# Altium PCB SmartWatch.PcbDoc
Units mm, origin at the board's own origin, x right, y up, seen from the top; angles counter-clockwise.
Board outline 43.1 x 46 mm, 4 copper layers (Top Layer, GND Layer, 3v3 Layer, Bottom Layer), stack 0.603 mm thick; 83 components, 69 nets, 346 pads, 97 vias.
Unrouted connection lines stored in the file: 1.
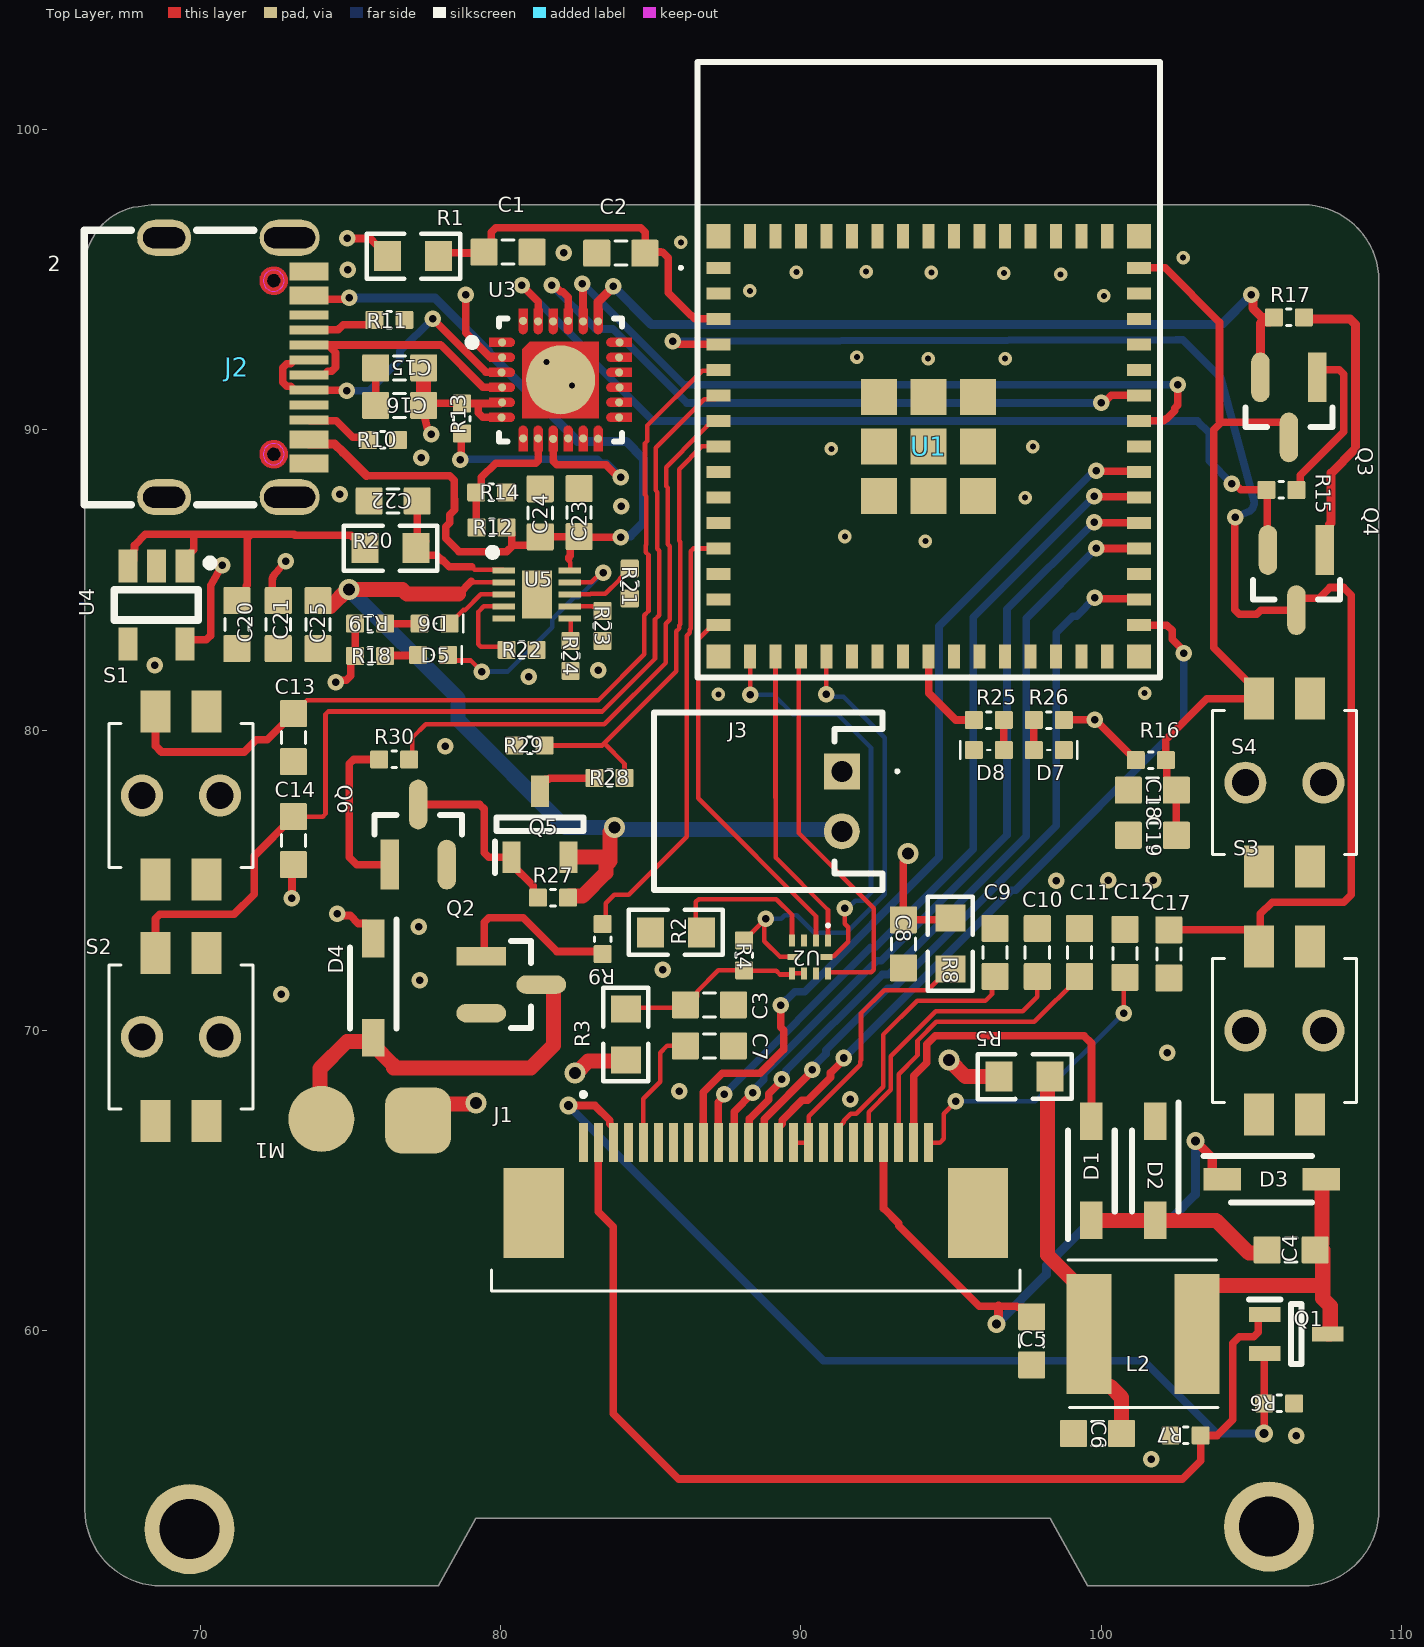
[diagram p0: Top Layer view]
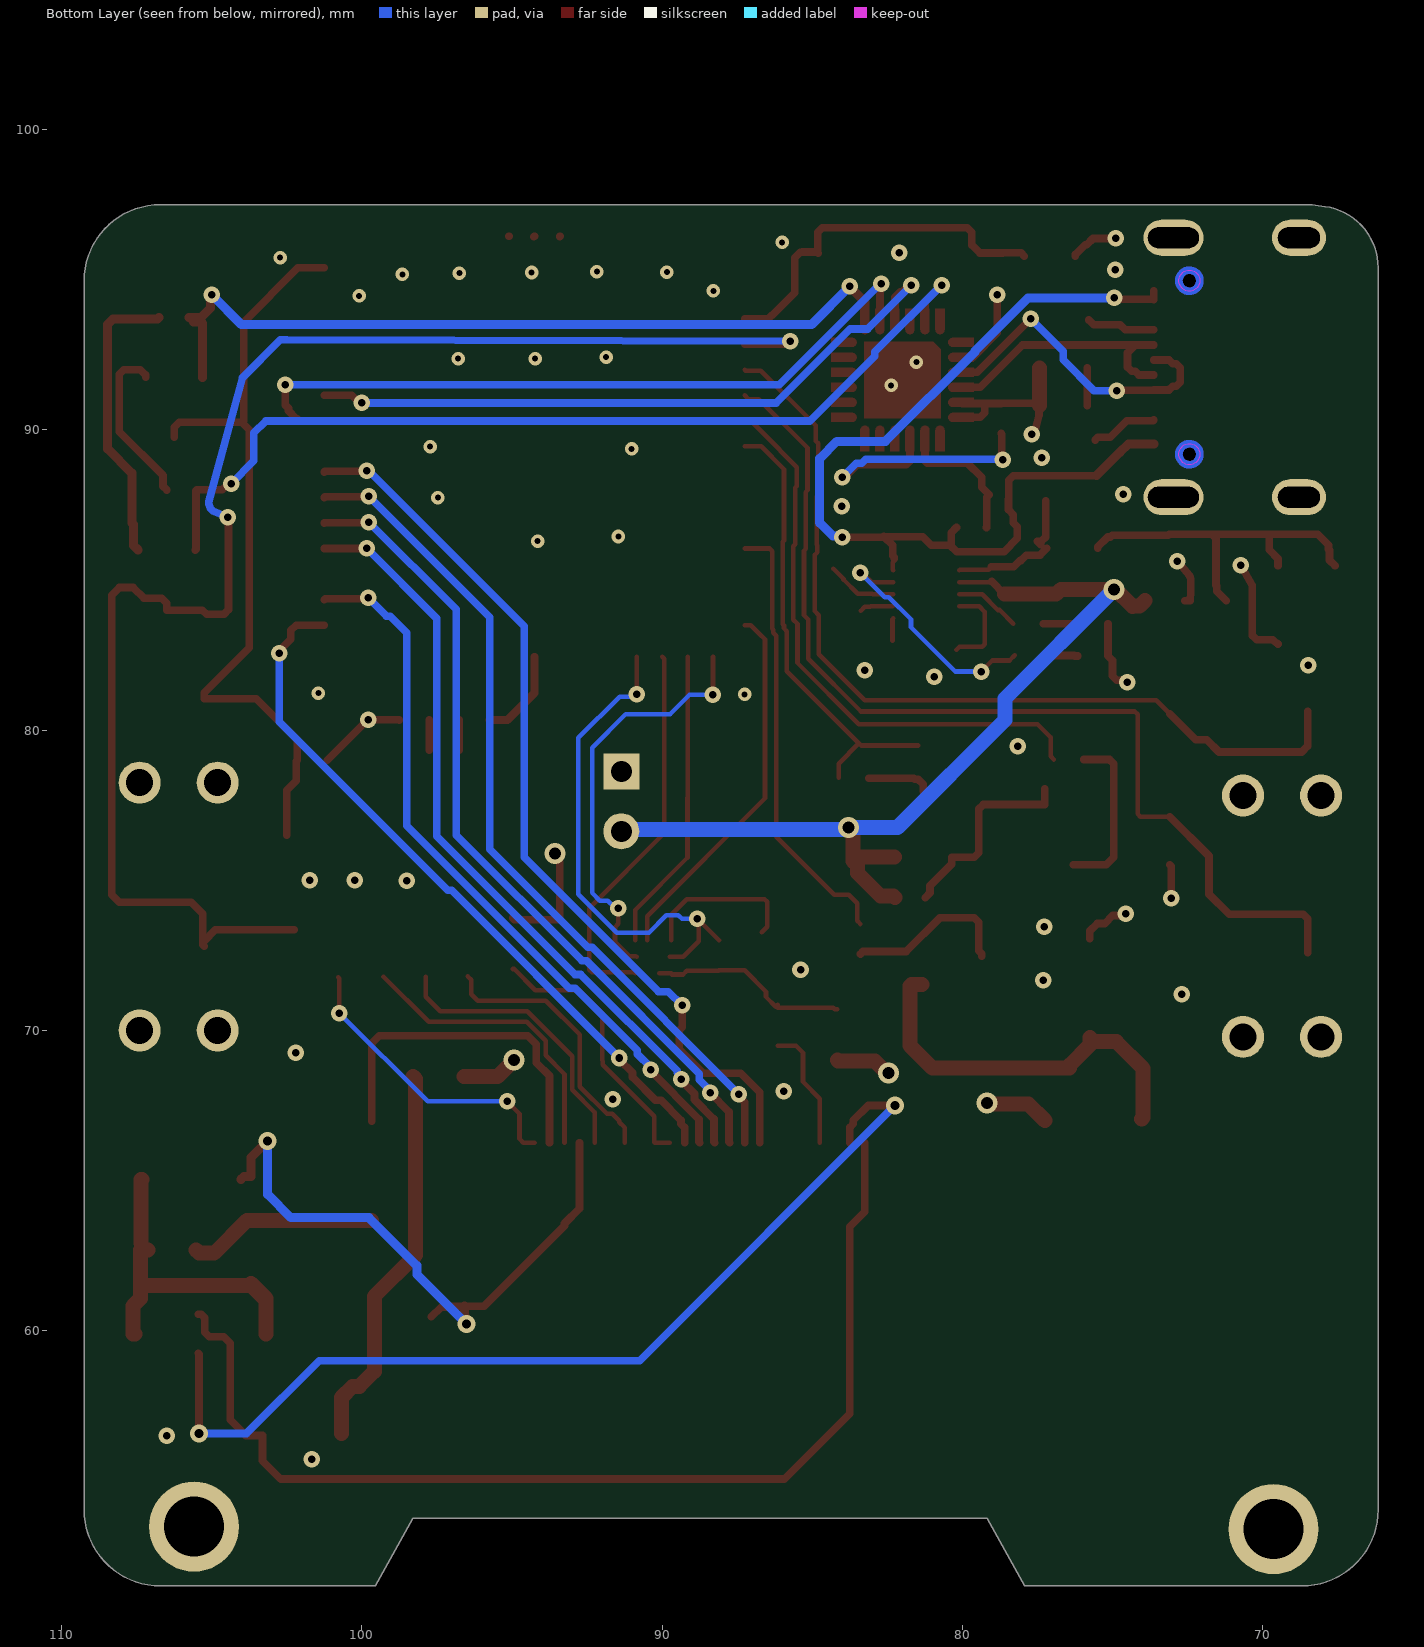
[diagram p1: Bottom Layer view, seen from below]
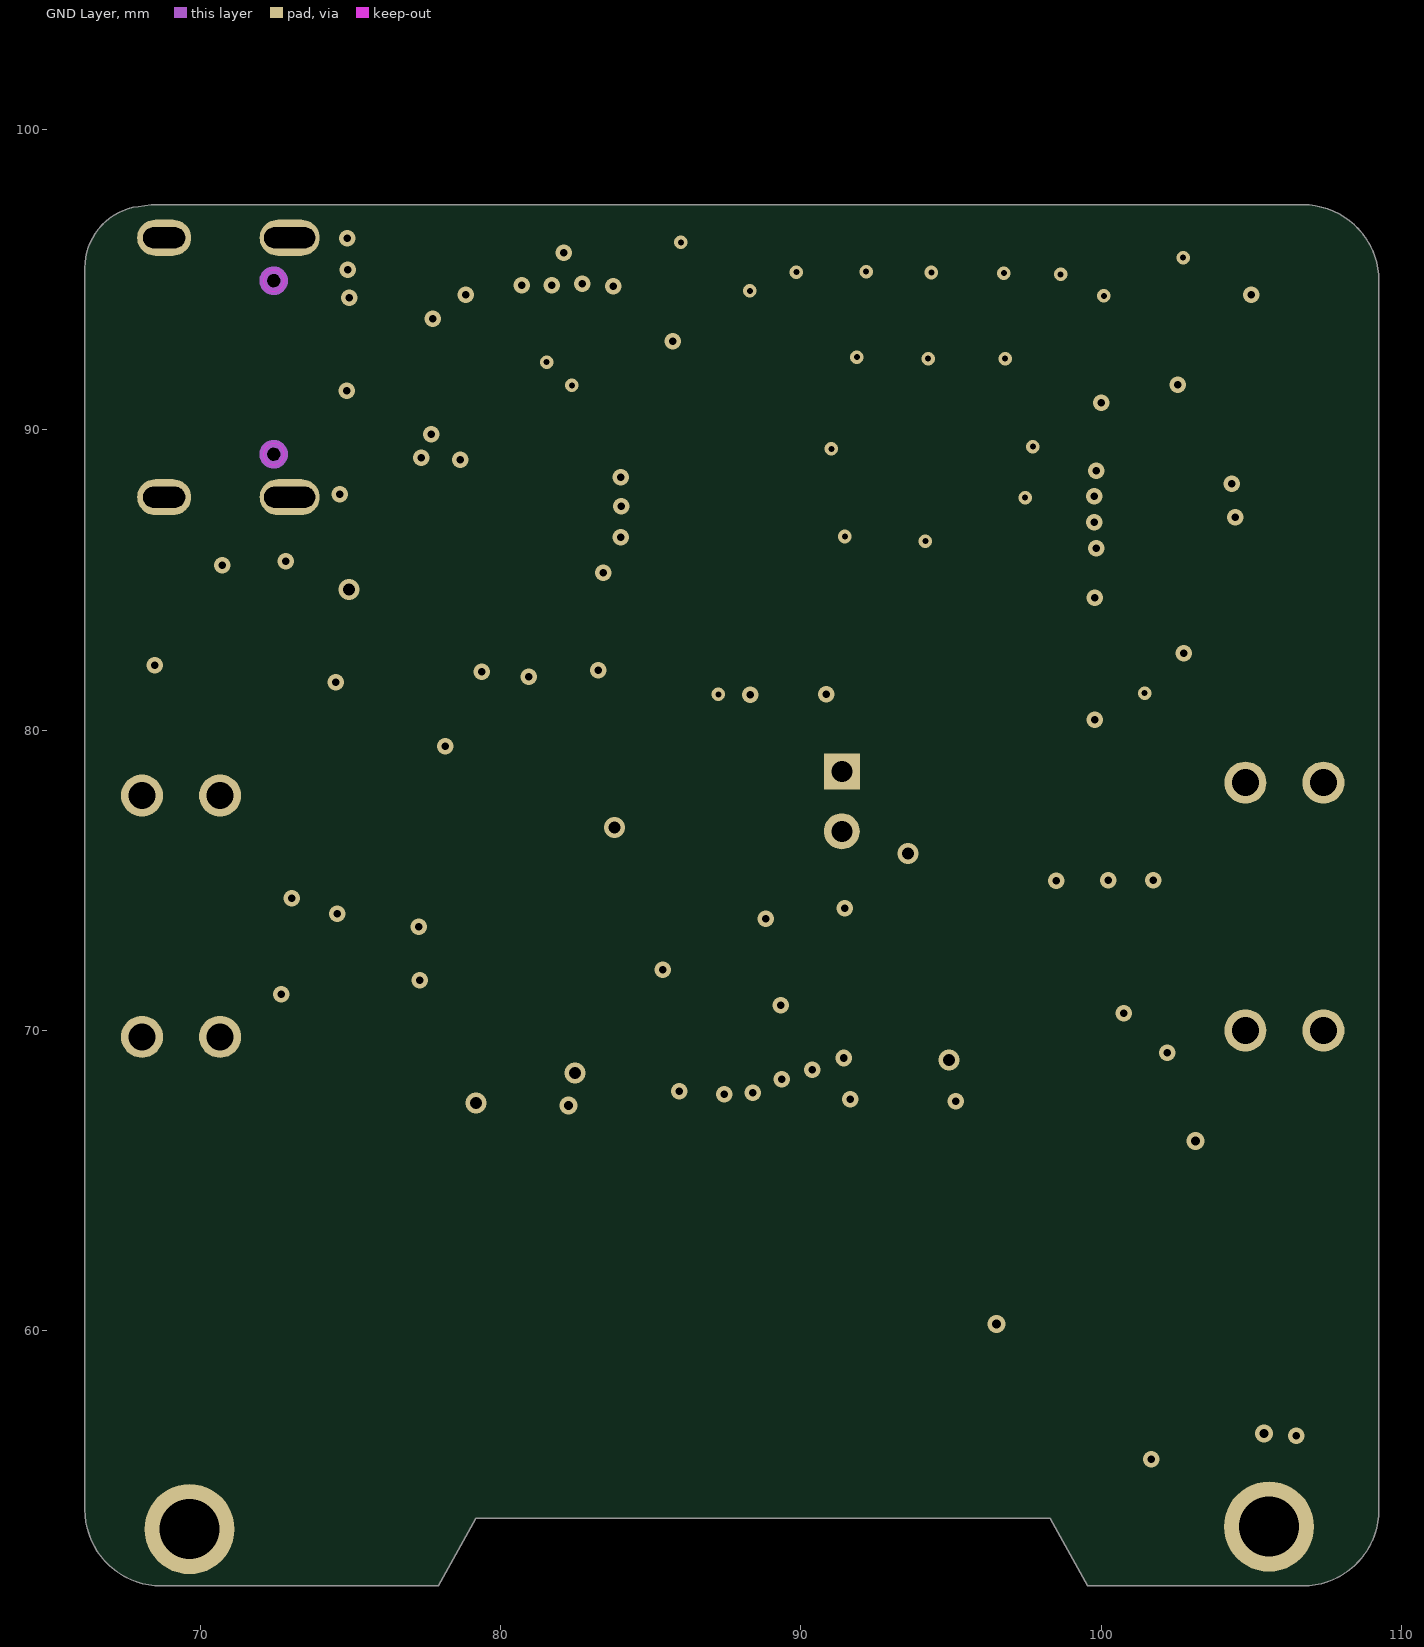
[diagram p2: GND Layer]
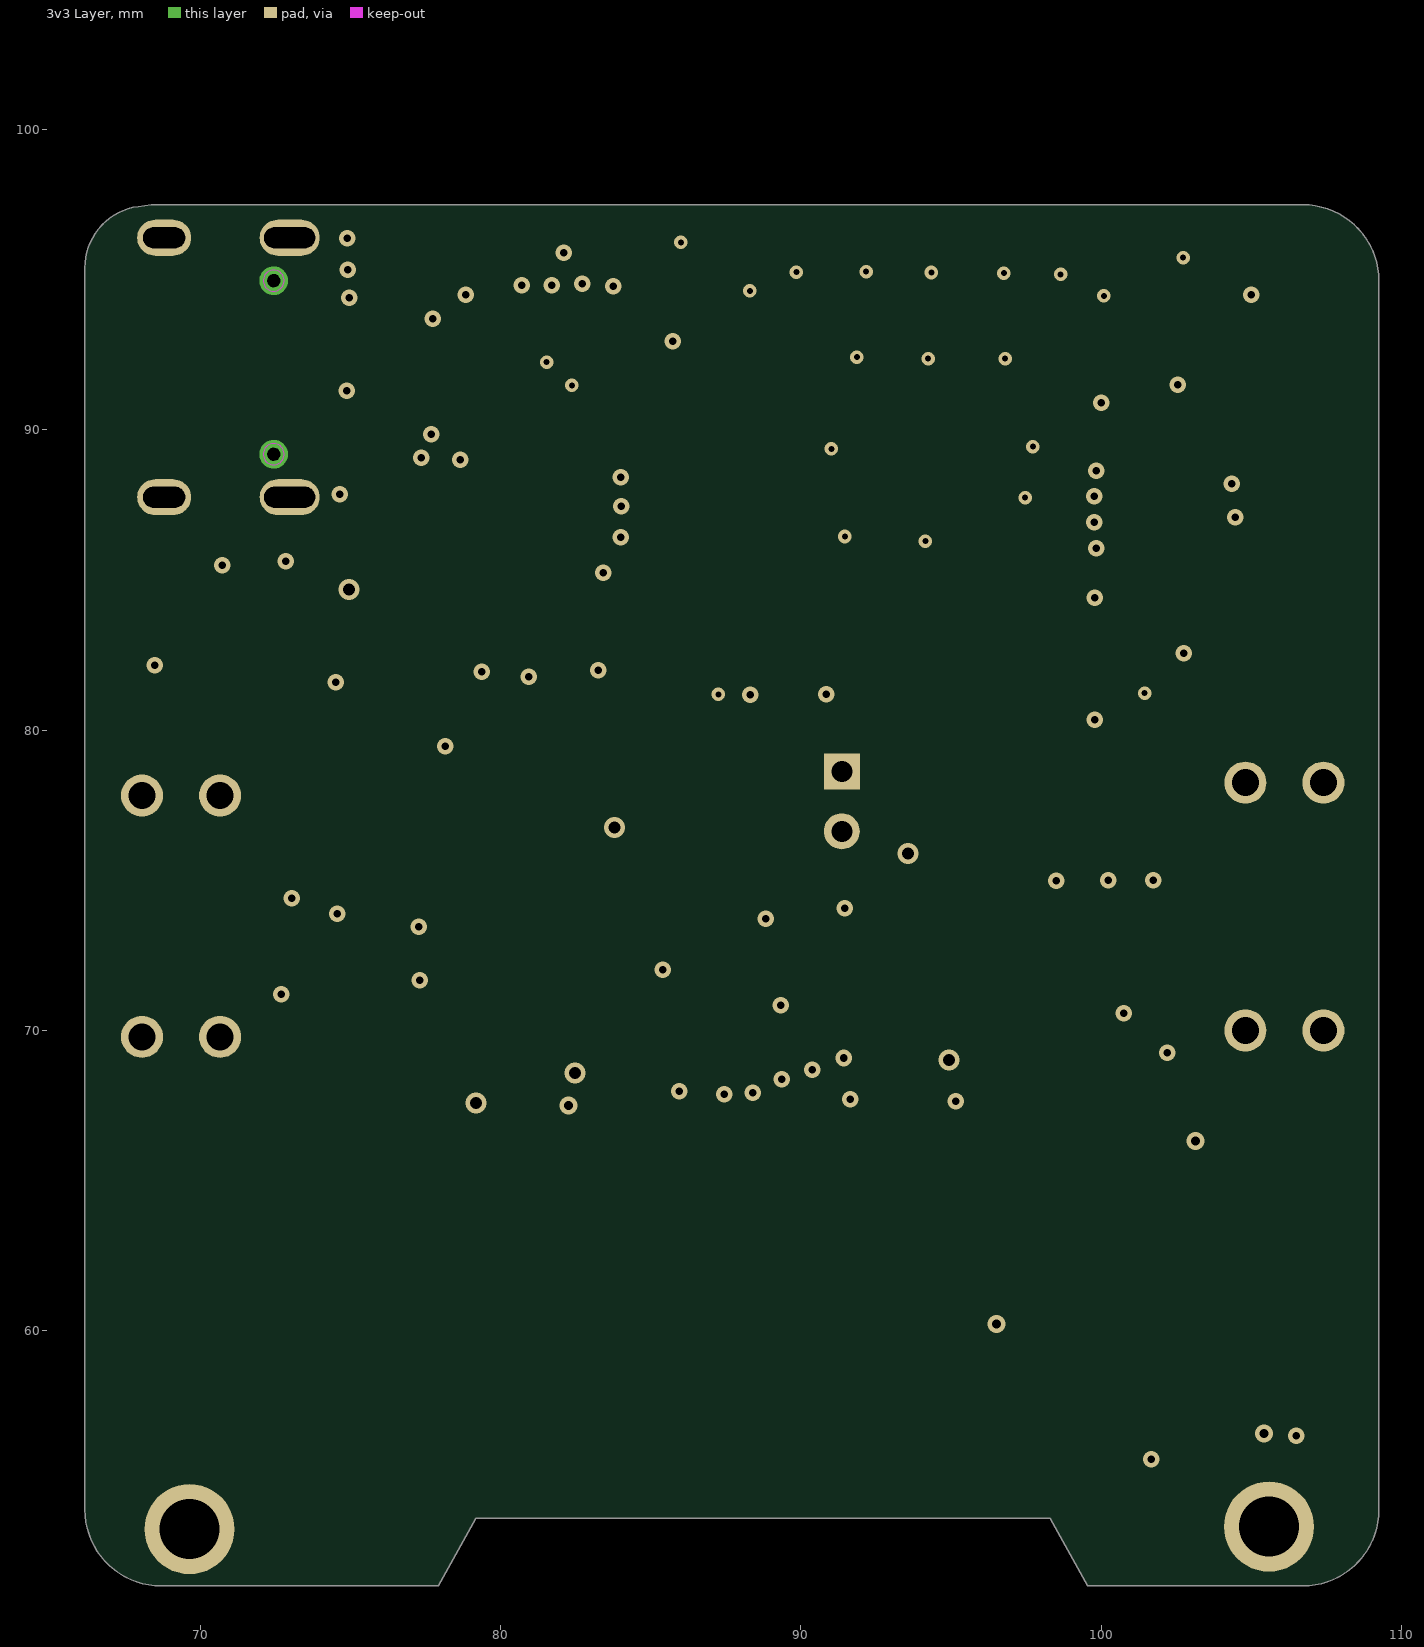
[diagram p3: 3v3 Layer]

## Layer stack, top to bottom
Top Solder: solder mask 0.0102, Solder Resist, Dk 3.5
Top Layer: signal copper 0.0356
Dielectric 2: prepreg 0.0711, PP-006, Dk 4.1
GND Layer: signal copper 0.035
Dielectric 1: dielectric 0.32, FR-4, Dk 4.8
3v3 Layer: signal copper 0.035
Dielectric 3: prepreg 0.0711, PP-006, Dk 4.1
Bottom Layer: signal copper 0.0356
Bottom Solder: solder mask 0.0102, Solder Resist, Dk 3.5

## Board outline
77.917,51.5 79.167,53.75 98.306,53.75 99.556,51.5 106.71,51.5 ccw(c106.71,54.04) 109.25,54.04 109.25,94.96 ccw(c106.71,94.96) 106.71,97.5 68.357,97.5 67.925,97.44 ccw(c68.209,95.402) 66.152,95.402 66.152,54.04 ccw(c68.692,54.04) 68.692,51.5

## Design rules (kind name [scope] priority, off if disabled: settings)
BoardOutlineClearance [All] p1: gap=0.2 ignorepadtopadclearanceinfootprint=FALSE
Clearance [All] p1: gap=0.102 ignorepadtopadclearanceinfootprint=FALSE except(0.127: Arc-Via Track-Via SMDPad-Via THPad-Via Via-Via Via-Fill Via-Poly Via-Region Via-Text; 0.25: Arc-Hole Track-Hole SMDPad-Hole THPad-Hole Via-Hole Fill-Hole Poly-Hole Region-Hole Text-Hole)
ComponentClearance [All] p1: gap=0.102 collisioncheckmode=3 verticalgap=0.102 showdistances=TRUE
DiffPairsRouting [All] p1: maxlimit=0.102 minlimit=0.102 mostfreqgap=0.102 toplayer_minwidth=0.102 toplayer_maxwidth=1816.048 toplayer_prefwidth=0.102 midlayer1_minwidth=0.102 midlayer1_maxwidth=1816.048 midlayer1_prefwidth=0.102 midlayer2_minwidth=0.102 midlayer2_maxwidth=1816.048 midlayer2_prefwidth=0.102 bottomlayer_minwidth=0.102 bottomlayer_maxwidth=1816.048 bottomlayer_prefwidth=0.102 maxuncoupledlength=12.7
Height [All] p1: minheight=0 maxheight=1816.048 prefheight=12.7
HoleSize [All] p1: absolutevalues=TRUE maxlimit=6.3 minlimit=0.2 maxpercent=80.000 minpercent=20.000
HoleToHoleClearance [All] p1: gap=0.25 allowstackedmicrovias=FALSE
MinimumAnnularRing [All] p1: minimumring=0.076
MinimumSolderMaskSliver [All] p1: minsoldermaskwidth=0
PlaneClearance [All] p1: clearance=0.102
PlaneConnect PlaneConnectPowerPads [InPadClass('PowerPads')] p1: planeconnectstyle=Direct reliefexpansion=0.508 reliefentries=4 reliefconductorwidth=0.254 reliefairgap=0.254
PlaneConnect [All] p2: pad.planeconnectstyle=Relief pad.reliefexpansion=0.3 pad.reliefentries=4 pad.reliefconductorwidth=0.102 pad.reliefairgap=0.102 via.planeconnectstyle=Direct via.reliefexpansion=0.3 via.reliefentries=4 via.reliefconductorwidth=0.127 via.reliefairgap=0.127
PolygonConnect PolygonConnectPowerPads [All vs (InPadClass('PowerPads'))] p1: connectstyle=Direct reliefconductorwidth=0.254 reliefentries=4 polygonreliefangle="90 Angle" airgapwidth=0.254
PolygonConnect [All] p2: thpad.connectstyle=Relief thpad.reliefconductorwidth=0.102 thpad.reliefentries=4 thpad.polygonreliefangle="90 Angle" thpad.airgapwidth=0.102 smdpad.connectstyle=Relief smdpad.reliefconductorwidth=0.102 smdpad.reliefentries=4 smdpad.polygonreliefangle="90 Angle" smdpad.airgapwidth=0.102 via.connectstyle=Direct via.reliefconductorwidth=0.127 via.reliefentries=4 via.polygonreliefangle="90 Angle" via.airgapwidth=0.127
RoutingVias [All] p1: holewidth=0.2 width=0.45 viastyle="Through Hole" minholewidth=0.2 minwidth=0.45 maxholewidth=6.3 maxwidth=6.55
SilkToSilkClearance [All] p1: silktosilkclearance=0
SilkToSolderMaskClearance [IsPad] p1: minsilkscreentomaskgap=0.102 clearancetoexposedcopper=TRUE
SolderMaskExpansion [All] p1: expansion=0.075 istentingtop=FALSE
SupplyNets "Schematic Supply Nets_4" [InNet('GND')] p1: voltage=0.000
SupplyNets "Schematic Supply Nets_3" [InNet('3.3')] p2: voltage=0.000
SupplyNets "Schematic Supply Nets_2" [InNet('VBUS')] p3: voltage=0.000
SupplyNets "Schematic Supply Nets_1" [InNet('VBAT')] p4: voltage=0.000
SupplyNets "Schematic Supply Nets" [InNet('SYS')] p5: voltage=0.000
Width [All] p1: maxlimit=1816.048 minlimit=0.102 preferedwidth=0.102
20 further rules are at their usual default settings.

## Components (designator, comment, footprint, x,y, rotation, side; value= is the part's Value field where it differs from the comment)
C1 "22uF" 0603_CAP 81.045,95.919 r180 top
C2 "0.1uF" 0603_CAP 83.198,95.885 r0 top
C3 "100nF" 0603_CAP 87.749,70.852 r180 top (schematic designator C5)
C4 "4.7uF" 0603_CAP 107.125,62.69 r180 top (schematic designator C6)
C5 "1uF" 0603_CAP 97.684,58.862 r90 top (schematic designator C7)
C6 "4.7uF" 0603_CAP 99.075,56.575 r0 top (schematic designator C8)
C7 "1uF" 0603_CAP 87.749,69.486 r180 top (schematic designator C9)
C8 "1uF" 0603_CAP 93.409,72.085 r90 top (schematic designator C10)
C9 "1uF" 0603_CAP 96.467,71.797 r90 top (schematic designator C11)
C10 "1uF" 0603_CAP 97.869,71.794 r90 top (schematic designator C12)
C11 "1uF" 0603_CAP 99.278,71.794 r90 top (schematic designator C13)
C12 "1uF" 0603_CAP 100.791,71.769 r90 top (schematic designator C14)
C13 "0.1uF" 0603_CAP 73.096,80.55 r270 top (schematic designator C3)
C14 "0.1uF" 0603_CAP 73.096,77.12 r270 top (schematic designator C4)
C15 "4.7uF" 0603_CAP 77.435,92.067 r180 top
C16 "0.1uF" 0603_CAP 77.435,90.814 r180 top
C17 "0.1uF" 0603_CAP 102.25,73.35 r270 top
C18 "1uF" 0603_CAP 100.9,78 r0 top
C19 "0.1uF" 0603_CAP 102.5,76.5 r180 top
C20 "1uF" 0603_CAP 71.211,82.714 r90 top
C21 "1uF" 0603_CAP 72.59,82.714 r90 top
C22 "10uF" 0603_CAP 75.619,87.634 r0 top
C23 "0.1uF" 0603_CAP 82.612,88.049 r270 top
C24 "2.2uF" 0603_CAP 81.316,88.039 r270 top
C25 "1uF" 0603_CAP 73.914,82.714 r90 top
D1 "MBR0530" SOD3716X135N 99.675,65.325 r90 top (schematic designator D2)
D2 "MBR0530" SOD3716X135N 101.798,65.325 r270 top (schematic designator D3)
D3 "MBR0530" SOD3716X135N 105.675,65.04 r0 top (schematic designator D4)
D4 "1N4148W-G3-08" SOD3716X135N 75.754,71.411 r270 top (schematic designator D1)
D5 "LED" 0402_LED 76.85,82.05 r0 top
D6 "LED" 0402_LED 76.9,83.1 r0 top
D7 "LED" 0402_LED 97.355,78.888 r0 top
D8 "LED" 0402_LED 97.155,79.788 r180 top
J1 "AFC07-S24ECC-00" AFC07S24ECC00 88.5,63.515 r0 top
J2 "USB-C" USB-C_1 65.997,96.996 r270 top
J3 "S2B-PH-K-S__LF__SN_" S2BPHKSLFSN 91.36,78.631 r270 top
L2 "10uH" NRS5040T3R3NMGJV 101.385,59.896 r180 top
M1 "Vibrating Motor" Motor 77.85,67.575 r180 top
Q1 "BSS138WH6327XTSA1" SOT65P210X110-3N 106.5,59.896 r0 top (schematic designator Q2)
Q2 "DTD123EKT146" FP-SS8050-G-IPC_A 80.35,71.525 r0 top (schematic designator Q1)
Q3 "DTD123EKT146" FP-SS8050-G-IPC_A 106.25,90.75 r270 top
Q4 "DTD123EKT146" FP-SS8050-G-IPC_A 106.5,85 r270 top
Q5 "mosfet" SOT95P230X110-3N 81.304,76.868 r90 top
Q6 "DTD123EKT146" FP-SS8050-G-IPC_A 77.253,76.524 r90 top
R1 "0" 0603 83.079,88.742 r0 top
R2 "0" 0603 79.842,80.316 r180 top (schematic designator R3)
R3 "0" 0603 91.213,75.852 r90 top (schematic designator R4)
R4 "4.7k" 0402_RES 88.255,71.2 r90 top (schematic designator R5)
R5 "0" 0603 103.437,61.416 r0 top (schematic designator R6)
R6 "2.2" 0402_RES 107.225,57.725 r180 top (schematic designator R7)
R7 "10k" 0402_RES 104.11,56.66 r180 top (schematic designator R8)
R8 "0" 0603 87.93,66.9 r270 top (schematic designator R9)
R9 "1k" 0402_RES 83.244,74.344 r270 top (schematic designator R2)
R10 "5.1k" 0402_RES 77.378,89.815 r180 top
R11 "5.1k" 0402_RES 77.591,93.812 r180 top
R12 "22.1k" 0402_RES 78.394,86.601 r0 top
R13 "1k" 0402_RES 78.858,89.08 r90 top
R14 "47k" 0402_RES 78.384,87.772 r0 top
R15 "10k" 0402_RES 104.7,87.85 r0 top
R16 "10k" 0402_RES 100.35,78.85 r0 top
R17 "10k" 0402_RES 104.95,93.6 r0 top
R18 "1.5k" 0402_RES 76.951,82.623 r180 top
R19 "1.5k" 0402_RES 76.951,83.7 r180 top
R20 "0" 0603 70.34,93.109 r180 top
R21 "2.5k" 0402_RES 84.447,83.583 r90 top
R22 "10k" 0402_RES 81.995,82.823 r180 top
R23 "18k" 0402_RES 83.537,82.171 r90 top
R24 "10k" 0402_RES 82.478,81.173 r90 top
R25 "1.5k" 0402_RES 97.555,80.488 r180 top
R26 "1.5k" 0402_RES 96.955,80.188 r0 top
R27 "10k" 0402_RES 80.441,74.27 r0 top
R28 "10k" 0402_RES 84.923,78.559 r180 top
R29 "10k" 0402_RES 79.663,79.34 r0 top
R30 "1k" 0402_RES 75.153,78.873 r0 top
S1 "K2-1114SA-A4SW-06" K21114SAA4SW06 69.353,77.823 r90 top
S2 "K2-1114SA-A4SW-06" K21114SAA4SW06 69.353,69.786 r90 top
S3 "K2-1114SA-A4SW-06" K21114SAA4SW06 106.1,69.998 r90 top
S4 "K2-1114SA-A4SW-06" K21114SAA4SW06 106.1,78.252 r90 top
U1 "ESP32-S3-MINI-1-N8" ESP32S3MINI1N8 94.25,89.45 r0 top
U2 "MC3635" MC3635 90.3,72.45 r180 top
U3 "CP2102N-A02-GQFN24" FP-CP2102N-A02-GQFN24-MFG 81.994,91.666 r0 top
U4 "LDO" LDO 68.662,83.992 r90 top
U5 "BQ25185DLHR" SON40P220X200X80-11N 81.203,84.523 r0 top

## Footprints (in the part's own frame and the unit in brackets; to place one, negate y for a bottom-side part, rotate by r counter-clockwise, add the part's x,y. Pads: shape width x height; smd on the part's side, far side on the other; paste and mask are expansions set on the pad)
0402_LED [mm]
  rrect15% 0.6x0.6 smd: 1(0.4,0.45) 2(1.4,0.45)
  silkscreen extent 0.85,0.15 1.85,0.75, body extent 0.4,0.2 1.4,0.7, height 0.35
0402_RES [mm]
  rrect15% 0.6x0.6 smd: 1(0.8,0.15) 2(1.8,0.15)
  silkscreen extent 1.23,-0.13 1.38,0.43, body extent 0.8,-0.1 1.8,0.4, height 0.3
0603 [mm]
  rect 0.9x1 smd paste+0 mask+0.051: 1(-6.845,7.048) 2(-5.145,7.048)
  silkscreen extent -7.54,6.3 -4.43,7.8
0603_CAP [mm]
  rrect10% 0.9x0.9 smd: 1(0,0) 2(1.6,0)
  silkscreen extent 0.6,-0.4 1,0.4, body extent 0,-0.4 1.6,0.4, height 0.9
AFC07S24ECC00 [mm]
  rect 0.3x1.3 smd: 1(-5.75,2.75) 2(-5.25,2.75) 3(-4.75,2.75) 4(-4.25,2.75) 5(-3.75,2.75) 6(-3.25,2.75) 7(-2.75,2.75) 8(-2.25,2.75) 9(-1.75,2.75) 10(-1.25,2.75) 11(-0.75,2.75) 12(-0.25,2.75) 13(0.25,2.75) 14(0.75,2.75) 15(1.25,2.75) 16(1.75,2.75) 17(2.25,2.75) 18(2.75,2.75) 19(3.25,2.75) 20(3.75,2.75) 21(4.25,2.75) 22(4.75,2.75) 23(5.25,2.75) 24(5.75,2.75)
  rect 2x3 smd: MP1(-7.4,0.4) MP2(7.4,0.4)
  silkscreen extent -8.8,-2.2 8.8,4.4, body extent -8.8,-2.2 8.8,3.37, height 2.1
ESP32S3MINI1N8 [mm]
  rect 0.8x0.4 smd: 1(-7,5.95) 2(-7,5.1) 3(-7,4.25) 4(-7,3.4) 5(-7,2.55) 6(-7,1.7) 7(-7,0.85) 8(-7,0) 9(-7,-0.85) 10(-7,-1.7) 11(-7,-2.55) 12(-7,-3.4) 13(-7,-4.25) 14(-7,-5.1) 15(-7,-5.95) 31(7,-5.95) 32(7,-5.1) 33(7,-4.25) 34(7,-3.4) 35(7,-2.55) 36(7,-1.7) 37(7,-0.85) 38(7,0) 39(7,0.85) 40(7,1.7) 41(7,2.55) 42(7,3.4) 43(7,4.25) 44(7,5.1) 45(7,5.95)
  rect 0.4x0.8 smd: 16(-5.95,-7) 17(-5.1,-7) 18(-4.25,-7) 19(-3.4,-7) 20(-2.55,-7) 21(-1.7,-7) 22(-0.85,-7) 23(0,-7) 24(0.85,-7) 25(1.7,-7) 26(2.55,-7) 27(3.4,-7) 28(4.25,-7) 29(5.1,-7) 30(5.95,-7) 46(5.95,7) 47(5.1,7) 48(4.25,7) 49(3.4,7) 50(2.55,7) 51(1.7,7) 52(0.85,7) 53(0,7) 54(-0.85,7) 55(-1.7,7) 56(-2.55,7) 57(-3.4,7) 58(-4.25,7) 59(-5.1,7) 60(-5.95,7)
  rect 1.2x1.2 smd: 61(0,0) 66(-1.65,1.65) 67(-1.65,0) 68(-1.65,-1.65) 69(0,-1.65) 70(1.65,-1.65) 71(1.65,0) 72(1.65,1.65) 73(0,1.65)
  rect 0.8x0.8 smd: 62(-7,7) 63(-7,-7) 64(7,-7) 65(7,7)
  silkscreen extent -8.3,-7.7 7.7,12.8, body extent -7.7,-7.7 7.7,12.81, height 2.55
FP-CP2102N-A02-GQFN24-MFG [mm]
  round 0.27 smd paste+0 mask+0: 1(-1.95,1.25) 2(-1.95,0.75) 3(-1.965,0.25) 4(-1.95,-0.25) 5(-1.95,-0.75) 6(-1.964,-1.249) 7(-1.25,-1.95) 8(-0.75,-1.95) 9(-0.25,-1.965) 10(0.25,-1.95) 11(0.75,-1.95) 12(1.25,-1.959) 13(1.95,-1.25) 14(1.95,-0.75) 15(1.965,-0.25) 16(1.95,0.25) 17(1.95,0.75) 18(1.965,1.25) 19(1.25,1.95) 20(0.75,1.95) 21(0.25,1.965) 22(-0.25,1.95) 23(-0.75,1.95) 24(-1.25,1.965)
  round 2.295 smd paste+0 mask+0: 25(0,0)
  Top Layer region: -2.375,1.4 -1.675,1.4 -1.618,1.389 -1.569,1.356 -1.536,1.307 -1.525,1.25 -1.525,1.25 -1.536,1.193 -1.569,1.144 -1.618,1.111 -1.675,1.1 -1.675,1.1 -2.375,1.1
  Top Layer region: -2.375,0.9 -1.675,0.9 -1.618,0.889 -1.569,0.856 -1.536,0.807 -1.525,0.75 -1.525,0.75 -1.536,0.693 -1.569,0.644 -1.618,0.611 -1.675,0.6 -1.675,0.6 -2.375,0.6
  Top Layer region: -2.375,0.4 -1.675,0.4 -1.618,0.389 -1.569,0.356 -1.536,0.307 -1.525,0.25 -1.525,0.25 -1.536,0.193 -1.569,0.144 -1.618,0.111 -1.675,0.1 -1.675,0.1 -2.375,0.1
  Top Layer region: -2.375,-0.1 -1.675,-0.1 -1.618,-0.111 -1.569,-0.144 -1.536,-0.193 -1.525,-0.25 -1.525,-0.25 -1.536,-0.307 -1.569,-0.356 -1.618,-0.389 -1.675,-0.4 -1.675,-0.4 -2.375,-0.4
  Top Layer region: -2.375,-0.6 -1.675,-0.6 -1.618,-0.611 -1.569,-0.644 -1.536,-0.693 -1.525,-0.75 -1.525,-0.75 -1.536,-0.807 -1.569,-0.856 -1.618,-0.889 -1.675,-0.9 -1.675,-0.9 -2.375,-0.9
  Top Layer region: -2.375,-1.1 -1.675,-1.1 -1.618,-1.111 -1.569,-1.144 -1.536,-1.193 -1.525,-1.25 -1.525,-1.25 -1.536,-1.307 -1.569,-1.356 -1.618,-1.389 -1.675,-1.4 -1.675,-1.4 -2.375,-1.4
  Top Layer region: -1.4,-2.375 -1.4,-1.675 -1.389,-1.618 -1.356,-1.569 -1.307,-1.536 -1.25,-1.525 -1.25,-1.525 -1.193,-1.536 -1.144,-1.569 -1.111,-1.618 -1.1,-1.675 -1.1,-1.675 -1.1,-2.375
  Top Layer region: -0.9,-2.375 -0.9,-1.675 -0.889,-1.618 -0.856,-1.569 -0.807,-1.536 -0.75,-1.525 -0.75,-1.525 -0.693,-1.536 -0.644,-1.569 -0.611,-1.618 -0.6,-1.675 -0.6,-1.675 -0.6,-2.375
  Top Layer region: -0.4,-2.375 -0.4,-1.675 -0.389,-1.618 -0.356,-1.569 -0.307,-1.536 -0.25,-1.525 -0.25,-1.525 -0.193,-1.536 -0.144,-1.569 -0.111,-1.618 -0.1,-1.675 -0.1,-1.675 -0.1,-2.375
  Top Layer region: 0.1,-2.375 0.1,-1.675 0.111,-1.618 0.144,-1.569 0.193,-1.536 0.25,-1.525 0.25,-1.525 0.307,-1.536 0.356,-1.569 0.389,-1.618 0.4,-1.675 0.4,-1.675 0.4,-2.375
  Top Layer region: 0.6,-2.375 0.6,-1.675 0.611,-1.618 0.644,-1.569 0.693,-1.536 0.75,-1.525 0.75,-1.525 0.807,-1.536 0.856,-1.569 0.889,-1.618 0.9,-1.675 0.9,-1.675 0.9,-2.375
  Top Layer region: 1.1,-2.375 1.1,-1.675 1.111,-1.618 1.144,-1.569 1.193,-1.536 1.25,-1.525 1.25,-1.525 1.307,-1.536 1.356,-1.569 1.389,-1.618 1.4,-1.675 1.4,-1.675 1.4,-2.375
  Top Layer region: 2.375,-1.4 1.675,-1.4 1.618,-1.389 1.569,-1.356 1.536,-1.307 1.525,-1.25 1.525,-1.25 1.536,-1.193 1.569,-1.144 1.618,-1.111 1.675,-1.1 1.675,-1.1 2.375,-1.1
  Top Layer region: 2.375,-0.9 1.675,-0.9 1.618,-0.889 1.569,-0.856 1.536,-0.807 1.525,-0.75 1.525,-0.75 1.536,-0.693 1.569,-0.644 1.618,-0.611 1.675,-0.6 1.675,-0.6 2.375,-0.6
  Top Layer region: 2.375,-0.4 1.675,-0.4 1.618,-0.389 1.569,-0.356 1.536,-0.307 1.525,-0.25 1.525,-0.25 1.536,-0.193 1.569,-0.144 1.618,-0.111 1.675,-0.1 1.675,-0.1 2.375,-0.1
  Top Layer region: 2.375,0.1 1.675,0.1 1.618,0.111 1.569,0.144 1.536,0.193 1.525,0.25 1.525,0.25 1.536,0.307 1.569,0.356 1.618,0.389 1.675,0.4 1.675,0.4 2.375,0.4
  Top Layer region: 2.375,0.6 1.675,0.6 1.618,0.611 1.569,0.644 1.536,0.693 1.525,0.75 1.525,0.75 1.536,0.807 1.569,0.856 1.618,0.889 1.675,0.9 1.675,0.9 2.375,0.9
  Top Layer region: 2.375,1.1 1.675,1.1 1.618,1.111 1.569,1.144 1.536,1.193 1.525,1.25 1.525,1.25 1.536,1.307 1.569,1.356 1.618,1.389 1.675,1.4 1.675,1.4 2.375,1.4
  Top Layer region: 1.4,2.375 1.4,1.675 1.389,1.618 1.356,1.569 1.307,1.536 1.25,1.525 1.25,1.525 1.193,1.536 1.144,1.569 1.111,1.618 1.1,1.675 1.1,1.675 1.1,2.375
  Top Layer region: 0.9,2.375 0.9,1.675 0.889,1.618 0.856,1.569 0.807,1.536 0.75,1.525 0.75,1.525 0.693,1.536 0.644,1.569 0.611,1.618 0.6,1.675 0.6,1.675 0.6,2.375
  Top Layer region: 0.4,2.375 0.4,1.675 0.389,1.618 0.356,1.569 0.307,1.536 0.25,1.525 0.25,1.525 0.193,1.536 0.144,1.569 0.111,1.618 0.1,1.675 0.1,1.675 0.1,2.375
  Top Layer region: -0.1,2.375 -0.1,1.675 -0.111,1.618 -0.144,1.569 -0.193,1.536 -0.25,1.525 -0.25,1.525 -0.307,1.536 -0.356,1.569 -0.389,1.618 -0.4,1.675 -0.4,1.675 -0.4,2.375
  Top Layer region: -0.6,2.375 -0.6,1.675 -0.611,1.618 -0.644,1.569 -0.693,1.536 -0.75,1.525 -0.75,1.525 -0.807,1.536 -0.856,1.569 -0.889,1.618 -0.9,1.675 -0.9,1.675 -0.9,2.375
  Top Layer region: -1.1,2.375 -1.1,1.675 -1.111,1.618 -1.144,1.569 -1.193,1.536 -1.25,1.525 -1.25,1.525 -1.307,1.536 -1.356,1.569 -1.389,1.618 -1.4,1.675 -1.4,1.675 -1.4,2.375
  Top Layer region: -1.275,-1.275 -1.275,1.025 -1.025,1.275 1.275,1.275 1.275,-1.275 -1.275,-1.275
  silkscreen extent -3.07,-2.05 2.05,2.05, body extent -2.48,-2.48 2.48,2.48, height 0.25
FP-SS8050-G-IPC_A [mm]
  rect 1.657x0.612 smd paste+0 mask+0: 1(-1.001,0.95)
  rrect100% 1.657x0.612 smd paste+0 mask+0: 2(-1.001,-0.95) 3(1.001,0)
  silkscreen extent 0,-1.45 0.65,1.45, body extent -2.33,-1.95 2.33,1.95, height 0.25
K21114SAA4SW06 [mm]
  rect 1.4x1 smd: 1(-2.8,0.85) 2(-2.8,-0.85) 3(2.8,0.85) 4(2.8,-0.85)
  round 1.4 hole 0.9: MH1(0,1.3) MH2(0,-1.3)
  silkscreen extent -2.4,-2.4 2.4,2.4, body extent -3.4,-2.4 3.4,2.4, height 1.75
LDO [mil]
  rect 43.5x24.5 smd paste+0 mask+2: 1(58.25,-32.48) 2(58.25,4.89) 3(58.25,42.3) 4(-44.11,42.3) 5(-44.11,-32.48)
  silkscreen extent -13,-70 67,60, body extent -48,-52 63,62, height 45
MC3635 [mm]
  rect 0.2x0.4 smd: 1(-0.6,-0.55) 2(-0.2,-0.55) 3(0.2,-0.55) 4(0.6,-0.55) 6(0.6,0.55) 7(0.2,0.55) 8(-0.2,0.55) 9(-0.6,0.55)
  rect 0.4x0.2 smd: 5(0.55,0) 10(-0.55,0)
  silkscreen extent -0.65,-1.1 -0.55,-1, body extent -0.8,-0.8 0.8,0.8, height 1.04
Motor [mm]
  rrect50% 2.2x2.2 smd: 1(0.6,0.575)
  round 2.2 smd: 2(3.825,0.525)
NRS5040T3R3NMGJV [mm]
  rect 1.5x4 smd: 1(-1.8,0) 2(1.8,0)
  silkscreen extent -2.5,-2.45 2.5,2.45, body extent -2.45,-2.45 2.45,2.45, height 4.1
S2BPHKSLFSN [mm]
  rect 1.2x1.2 hole 0.7: 1(0,0)
  round 1.2 hole 0.7: 2(2,0)
  silkscreen extent -1.95,-6.25 3.95,1.9, body extent -1.95,-6.25 3.95,1.35, height 4.9
SOD3716X135N [mm]
  rect 1.25x0.75 smd: 1(-1.65,0) 2(1.65,0)
  silkscreen extent -2.27,-0.77 1.35,0.77, body extent -1.85,-0.77 1.85,0.77, height 1.35
SON40P220X200X80-11N [mm]
  rect 0.75x0.2 smd: 1(-1.1,0.8) 2(-1.1,0.4) 3(-1.1,0) 4(-1.1,-0.4) 5(-1.1,-0.8) 6(1.1,-0.8) 7(1.1,-0.4) 8(1.1,0) 9(1.1,0.4) 10(1.1,0.8)
  rect 1x1.6 smd: 11(0,0)
  silkscreen extent -1.6,1.28 -1.35,1.52, body extent -1.15,-1 1.15,1, height 0.8
SOT65P210X110-3N [mm]
  rect 1.05x0.5 smd: 1(-1.05,0.65) 2(-1.05,-0.65) 3(1.05,0)
  silkscreen extent -1.58,-1 0.18,1.15, body extent -1.05,-1 1.05,1, height 1.1
SOT95P230X110-3N [mm]
  rect 1.05x0.6 smd: 1(-1.1,0.95) 2(-1.1,-0.95) 3(1.1,0)
  silkscreen extent -1.63,-1.45 0.23,1.5, body extent -1.2,-1.45 1.2,1.45, height 0.95
USB-C_1 [mm]
  oval 1.2x2 hole 0.7 slot 1.7 at 90 deg paste-2539.97 mask+0.051: 1(0.596,6.972) 2(9.236,6.972)
  oval 1.2x1.8 hole 0.7 slot 1.4 at 90 deg paste-2539.97 mask+0.051: 3(0.596,2.792) 4(9.236,2.792)
  rect 0.3x1.3 smd paste-100 mask+0.05: A1(1.566,7.622) A4(2.366,7.622) A5(3.666,7.622) A6(4.666,7.622) A7(5.166,7.622) A8(6.166,7.622) A9(7.466,7.622) A12(8.266,7.622) B1(7.966,7.622) B4(7.166,7.622) B5(6.666,7.622) B6(5.666,7.622) B7(4.166,7.622) B8(3.166,7.622) B9(2.666,7.622) B12(1.866,7.622)
  Keep-Out Layer board cut-out: 8.156,6.442 8.121,6.594 8.024,6.716 7.884,6.783 7.728,6.783 7.588,6.716 7.491,6.594 7.456,6.442 7.456,6.442 7.491,6.29 7.588,6.168 7.728,6.101 7.884,6.101 8.024,6.168 8.121,6.29 8.156,6.442
  Keep-Out Layer board cut-out: 2.376,6.442 2.341,6.594 2.244,6.716 2.104,6.783 1.948,6.783 1.808,6.716 1.711,6.594 1.676,6.442 1.676,6.442 1.711,6.29 1.808,6.168 1.948,6.101 2.104,6.101 2.244,6.168 2.341,6.29 2.376,6.442
  Multi-Layer circle w0.254: c2.026,6.442 r0.35
  Multi-Layer circle w0.254: c7.806,6.442 r0.35
  silkscreen extent 0.34,0.13 9.49,5.78, body extent 0.37,0.08 9.57,8.03, height 3.2

## Part data
C1 C2 C3 C4 C5 C6 C7 C8 C9 C10 C11 C12 C13 C14 C15 C16 C17 C18 C19 C20 C21 C22 C23 C24 C25: library part C
D1 D2 D3 D4: library part CMP-00030-46456310-1, "1N4148W-G3-08 Rectifier Diode, 1 Phase, 1 Element, 0.15A, 100V V(RRM), Silicon", Average Rectified Current=150mA, Case/Package=SOD, Forward Voltage=1.2V, Max Operating Temperature=150°C, Max Repetitive Reverse Voltage (Vrrm)=100V, Max Reverse Voltage (DC)=75V, Min Operating Temperature=-55°C, Peak Non-Repetitive Surge Current=500mA, Contact Plating=Tin, Element Configuration=Single, Forward Current=150mA, Mount="Surface Mount", NexarPartId=46456310, Number of Pins=2, Reverse Recovery Time=4ns, RoHS=Compliant, Schedule B="8541100070, 8541100070|8541100070|8541100070|8541100070|8541100070", Weight=9.412042mg
J1: "Connector", Manufacturer_Name=JUSHUO, Datasheet Link=https://datasheet.lcsc.com/szlcsc/1811021340_JUSHUO-AFC07-S24ECC-00_C11092.pdf, Height=2mm, Manufacturer_Part_Number=AFC07-S24ECC-00
J2: library part USB-C_1
J3: "Connector", Manufacturer_Name="JST (JAPAN SOLDERLESS TERMINALS)", Manufacturer_Part_Number="S2B-PH-K-S (LF)(SN)", Datasheet Link=http://www.jst-mfg.com/product/pdf/eng/ePH.pdf, Height=4.8mm
L2: library part coil
M1: library part Component_1
Q1: "MOSFET (N-Channel)", Manufacturer_Name=Infineon, Mouser Part Number=726-BSS138WH6327XTSA, Arrow Part Number=BSS138WH6327XTSA1, Arrow Price/Stock=https://www.arrow.com/en/products/bss138wh6327xtsa1/infineon-technologies-ag?utm_currency=USD&region=europe, Datasheet Link=https://www.infineon.com/dgdl/Infineon-BSS138W-DS-v02_43-en.pdf?fileId=db3a304335113a6301351e62fcb4131f, Height=1mm, Manufacturer_Part_Number=BSS138WH6327XTSA1, Mouser Price/Stock=https://www.mouser.co.uk/ProductDetail/Infineon-Technologies/BSS138WH6327XTSA1?qs=Dj8dEyEphkMUJZog1oMAlA%3D%3D
Q2 Q3 Q4 Q6: "Transistor BJT NPN", Manufacturer_Name="ROHM Semiconductor", Mouser Part Number=755-DTD123EKT146, Datasheet Link=http://rohmfs.rohm.com/en/products/databook/datasheet/discrete/transistor/digital/dtd123ekt146-e.pdf, Height=1.3mm, Manufacturer_Part_Number=DTD123EKT146, Mouser Price/Stock=https://www.mouser.com/Search/Refine.aspx?Keyword=755-DTD123EKT146
R1 R2 R3 R4 R5 R6 R7 R8 R9 R10 R11 R12 R13 R14 R15 R16 R17 R18 R19 R20 R21 R22 R23 R25 R26 R27 R28 R29 R30: library part R
R24: library part R, "NTC thermistor"
S1 S2 S3 S4: "Switch", Manufacturer_Name="Korean Hroparts Elec", Datasheet Link=https://datasheet.lcsc.com/szlcsc/Korean-Hroparts-Elec-K2-1114SA-A4SW-06_C136662.pdf, Height=1.65mm, Manufacturer_Part_Number=K2-1114SA-A4SW-06
U1: "Integrated Circuit", Manufacturer_Name="Espressif Systems", Mouser Part Number=356-ESP32-S3-MINI1N8, Datasheet Link=https://www.espressif.com/sites/default/files/documentation/esp32-s3-mini-1_mini-1u_datasheet_en.pdf, Height=2.55mm, Manufacturer_Part_Number=ESP32-S3-MINI-1-N8, Mouser Price/Stock=https://www.mouser.co.uk/ProductDetail/Espressif-Systems/ESP32-S3-MINI-1-N8?qs=XAiT9M5g4x82rl6F%2FIYUQg%3D%3D
U3: "Integrated Circuit", Manufacturer_Name="Silicon Labs", Mouser Part Number=634-CP2102NA02GQFN24, Arrow Part Number=CP2102N-A02-GQFN24, Arrow Price/Stock=https://www.arrow.com/en/products/cp2102n-a02-gqfn24/silicon-labs?utm_currency=USD&region=europe, Datasheet Link=https://componentsearchengine.com/Datasheets/1/CP2102N-A02-GQFN24.pdf, Height=0.8mm, Manufacturer_Part_Number=CP2102N-A02-GQFN24, Mouser Price/Stock=https://www.mouser.co.uk/ProductDetail/Silicon-Labs/CP2102N-A02-GQFN24?qs=u16ybLDytRYKabtL%2FE7DZA%3D%3D
U5: "Integrated Circuit", Manufacturer_Name="Texas Instruments", Mouser Part Number=595-BQ25185DLHR, Datasheet Link=https://www.ti.com/lit/ds/symlink/bq25185.pdf?ts=1706857561339&ref_url=https%253A%252F%252Fwww.ti.com%252Fproduct%252FBQ25185, Height=0.8mm, Manufacturer_Part_Number=BQ25185DLHR, Mouser Price/Stock=https://www.mouser.co.uk/ProductDetail/Texas-Instruments/BQ25185DLHR?qs=Z%252BL2brAPG1IbO%2FV3RqsaPw%3D%3D

## Free pads (board coordinates)
  round 3 hole 2: 1(69.638,53.39) 2(105.588,53.472)

## Via types
v1: diameter 0.55, hole 0.25, Top Layer to Bottom Layer, 66 vias
v2: diameter 0.45, hole 0.2, Top Layer to Bottom Layer, 21 vias
v3: diameter 0.7, hole 0.4, Top Layer to Bottom Layer, 6 vias
v4: diameter 0.6, hole 0.3, Top Layer to Bottom Layer, 4 vias

## Nets (pads, with @x,y where several pads share a name; then routed paths per layer and width w, separated by ;. In a path a pad name is that pad's centre, name@x,y a point inside that pad or via, vN(x,y) a via of type N, cw(c..) or ccw(c..) an arc to the next point about the centre after c; other vN are vias at no path point)
3.3: C8.2 C15.1 C16.1 C21.2 D4.1 M1.1 R1.1 R3.1 R5.1 R8.1 R13.2 R16.1 R18.2 R19.2 R26.2 U3.5 U3.6 U4.5 | length 29.6
  Top Layer w0.254: U4.5 69.672,83.006 70.196,83.006 70.345,83.155 70.345,84.818 v1(70.728,85.5) ; C21.2 72.404,84.314 72.396,84.637 72.396,85.009 cw(c72.65,85.009) 72.456,85.172 v1(72.84,85.627) ; v1(74.506,81.604) 74.563,81.66 74.851,81.66 75,81.809 75,82.322 R18.2 R19.2 ; v1(74.556,73.885) 74.613,73.828 74.987,73.828 75.256,73.559 75.506,73.559 75.754,73.311 D4.1 ; v1(74.884,96.375) 75.649,96.375 75.861,96.163 75.911,96.163 76.234,95.84 R1.1 ; v1(77.682,89.862) 77.682,89.871 77.566,89.987 77.566,89.995 77.448,90.491 C16.1 77.515,90.894 R13.2@78.693,90.894 ; R13.2 79.25,90.88 ; U3.6 79.399,90.417 79.25,90.566 79.25,90.88 ; U3.5 80.04,90.916 80.004,90.88 79.25,90.88 ; v3(93.569,75.894) 93.569,75.773 93.409,75.613 C8.2 94.918,73.685 R8.1 ; R26.2 98.758,80.342 99.779,80.342 v1(99.783,80.345) 99.805,80.345 R16.1
  Top Layer w0.5: M1.1 77.801,67.551 79.137,67.551 v3(79.175,67.59) ; C16.1 C15.1 ; v3(82.467,68.584) 82.521,68.584 82.915,68.978 84.135,68.978 R3.1 ; v3(94.927,69.011) 95.474,68.464 R5.1
ADC_EN: R30.2 U1.7 | length 19.2
  Top Layer w0.152: R30.2 77.06,79.13 77.06,79.758 77.498,80.196 83.447,80.196 85.49,82.238 85.49,83.541 85.627,83.678 85.627,86.127 85.568,86.186 85.568,88.072 85.509,88.131 85.509,88.759 86.634,89.884 ; 86.635,89.884 87.05,90.3 U1.7
BUSY_EPD: J1.9 U1.37 | length 30.3
  Top Layer w0.254: J1.9 86.75,67.94 87.383,68.573 88.635,68.573 89.429,69.367 89.429,70.008 89.325,70.112 v1(89.325,70.834) ; v1(99.838,88.64) 99.858,88.62 101.23,88.62 U1.37
  Bottom Layer w0.254: v1(89.325,70.834) 89.335,70.834 89.794,71.293 90.119,71.293 94.597,75.771 94.597,83.462 99.774,88.64 v1(99.838,88.64)
CC1: J2.A5 R11.2 | length 2.3
  Top Layer w0.254: J2.A5 74.58,93.33 74.75,93.5 75.629,93.5 R11.2
CC2: J2.B5 R10.2 | length 2.2
  Top Layer w0.254: J2.B5 73.642,90.307 74.521,90.307 75.077,89.751 75.492,89.751 R10.2
CS_ACCL: U1.18 U2.9 | length 13.1
  Top Layer w0.152: U1.18 89.924,82.374 89.924,76.575 92.424,74.075 92.424,72.024 92.335,71.934 90.924,71.934 90.9,71.911 U2.9
CS_EPD: J1.12 U1.34 | length 26.1
  Top Layer w0.254: J1.12 88.273,66.288 88.273,67.049 88.921,67.697 88.921,67.885 89.359,68.323 v1(89.359,68.375) ; v1(99.834,86.053) v1(99.834,86.053) 101.248,86.052 U1.34
  Bottom Layer w0.254: v1(89.359,68.375) 89.359,68.455 89.5,68.596 89.5,68.654 92.706,71.861 92.899,71.861 97.5,76.462 97.5,83.72 v1(99.834,86.053)
D+: J2.A6 J2.B6 U3.3 | length 10.8
  Top Layer w0.254: J2.A6 73.119,92.33 72.998,92.209 72.875,92.209 72.741,92.075 72.741,91.585 72.875,91.451 72.998,91.451 73.119,91.33 J2.B6 73.63,91.319 74.855,91.319 v1(74.865,91.309) ; v1(77.729,93.7) 79.51,91.919 80.026,91.919 U3.3
  Bottom Layer w0.254: v1(74.865,91.309) 75.615,91.309 76.644,92.338 76.644,92.614 v1(77.729,93.7)
D-: J2.A7 J2.B7 U3.4 | length 8.8
  Top Layer w0.254: J2.B7 77.995,92.83 79.409,91.416 U3.4 ; J2.A7@73.632,91.818 J2.A7 74.119,91.83 74.241,91.951 74.364,91.951 74.498,92.085 74.498,92.575 J2.B7@74.266,92.807
D/C_EPD: J1.11 U1.35 | length 27.2
  Top Layer w0.254: J1.11 87.773,66.288 87.773,67.297 v1(88.392,67.917) ; v1(99.765,86.927) 99.779,86.913 101.237,86.913 U1.35
  Bottom Layer w0.254: v1(88.392,67.917) 88.392,67.997 88.757,68.361 88.757,68.554 92.518,72.315 92.667,72.315 96.86,76.508 96.86,84.022 v1(99.765,86.927)
DTR: Q4.2 R15.1 U3.23 | length 31.7
  Top Layer w0.254: v1(80.694,94.819) 81.244,94.268 U3.23 ; v1(104.353,88.212) 104.433,88.212 104.645,88.001 R15.1 ; R15.1 105.525,87.975 105.525,86.026 Q4.2
  Bottom Layer w0.254: v1(80.694,94.819) 82.915,92.597 82.915,92.461 85.08,90.296 103.204,90.296 103.597,89.903 103.597,88.969 v1(104.353,88.212)
EN: C18.2 C19.1 Q3.3 R16.2 S4.3 U1.45 | length 26.4
  Top Layer w0.254: U1.45 102.127,95.4 103.937,93.59 103.937,90.314 104,90.251 105.249,90.251 ; C19.1 C18.2 102.186,78.314 102.186,78.964 R16.2 102.15,79.681 103.521,81.052 S4.3 105.25,81.252 103.751,82.751 103.751,90.001 104,90.25 ; 105.25,90.25 106.085,90.25 106.25,90.085 Q3.3
GDR: J1.2 Q1.1 R7.1 | length 36.4
  Top Layer w0.254: J1.2 83.25,63.964 83.751,63.462 83.751,57.239 85.932,55.058 102.694,55.058 103.31,55.675 R7.1 103.861,56.51 104.38,57.029 104.38,59.58 104.6,59.801 105.081,59.801 105.23,59.95 105.23,60.423 105.353,60.546 Q1.1
GND: C1.1 C2.1 C3.1 C5.1 C6.1 C7.1 C8.1 C9.2 C10.2 C11.2 C12.2 C13.2 C14.2 C17.2 C18.1 C19.2 C20.1 C21.1 C22.1 C23.1 C24.1 C25.1 D2.1 D7.2 D8.2 J1.8 J1.17 J2.A1 J2.A12 J2.B1 J2.B12 J3.1 Q2.2 Q6.2 R2.2 R6.1 R7.2 R10.1 R11.1 R14.2 R21.1 R22.1 R23.1 R24.1 R29.1 S1.1 S2.1 S3.1 S4.1 U1.1 U1.2 U1.42 U1.43 U1.46 U1.47 U1.48 U1.49 U1.50 U1.51 U1.52 U1.53 U1.54 U1.55 U1.56 U1.57 U1.58 U1.59 U1.60 U1.61 U1.62 U1.63 U1.64 U1.65 U1.66 U1.67 U1.68 U1.69 U1.70 U1.71 U1.72 U1.73 U2.8 U3.2 U3.25 U4.2 U5.5 U5.11 | length 4.1
  Top Layer w0.15: 82.94,90.605 83.061,90.605
  Top Layer w0.254: v1(73.048,74.408) 73.048,75.472 C14.2 ; v1(78.832,94.495) 78.832,93.23 79.643,92.419 80.041,92.419 U3.2 ; U1.54 U1.54@93.409,96.441 ; U1.53 U1.53@94.272,96.428
  other v1: 101.667,55.713 106.5,56.5 91.637,67.701 85.946,67.976 102.206,69.256 72.692,71.198 77.301,71.666 85.39,72.017 77.265,73.457 98.502,74.988 100.233,75.007 101.733,75.007 78.155,79.467 80.932,81.771 83.25,82 68.48,82.164 84.015,87.454 74.641,87.852 77.357,89.066 74.905,95.341 82.101,95.893
  other v2: 87.251,81.191 101.445,81.236 94.145,86.295 91.459,86.45 97.468,87.741 91.013,89.365 97.726,89.446 82.369,91.482 81.53,92.258 94.231,92.373 96.796,92.373 91.862,92.427 100.09,94.461 88.295,94.627 98.648,95.178 96.755,95.22 89.844,95.253 94.343,95.242 92.173,95.269 102.724,95.74 86,96.25
INT_ACCL: R4.2 U1.19 U2.5 | length 16.7
  Top Layer w0.152: R4.2 88.723,73.618 v1@88.776,73.618 ; v1(88.832,73.713) 88.832,73.675 v1@88.776,73.618 ; U2.5 89.3,72.45 88.776,72.974 v1@88.776,73.618 ; v1(90.836,81.191) 90.843,81.197 90.843,82.443 U1.19
  Bottom Layer w0.152: v1(88.832,73.713) 89.338,73.713 89.46,73.836 89.858,73.836 90.437,73.256 91.507,73.256 92.788,74.537 92.788,79.745 91.416,81.117 90.91,81.117 v1(90.836,81.191)
IO0: C17.1 Q4.3 S3.3 U1.4 | length 50.7
  Top Layer w0.254: v1(85.735,92.959) 85.815,92.959 85.924,92.85 U1.4@87.25,92.85 ; C17.1 104.877,73.35 S3.3@105.25,72.977 ; v1(104.471,87.097) 104.443,87.069 104.443,84.008 104.591,83.859 105.172,83.859 105.312,83.999 Q4.3 106.5,84.23 106.665,84.395 107.253,84.395 107.608,84.75 108.074,84.75 108.329,84.496 108.329,74.523 108.074,74.269 105.689,74.269 105.3,73.879 105.3,72.848 S3.3
  Bottom Layer w0.254: v1(85.735,92.959) 102.5,93 102.714,93 103.975,91.739 105.094,87.606 105.094,87.522 105.035,87.376 104.963,87.304 v1(104.471,87.097)
LED_GPIO: R25.2 U1.23 | length 3.1
  Top Layer w0.254: U1.23@94.25,82.449 94.25,81.237 95.149,80.338 R25.2
MISO_ACCL: U1.17 U2.1 | length 10.2
  Top Layer w0.152: U1.17@89.15,82.449 89.15,77.743 89.153,77.74 89.153,75.758 90.9,74.011 U2.1
MOSI_ACCL: U1.15 U2.2 | length 12.5
  Top Layer w0.152: U1.15 87.05,83.5 86.743,83.192 86.574,83.024 86.574,77.732 90.5,73.806 U2.2
MOSI_EPD: J1.14 U1.31 | length 24.2
  Top Layer w0.254: J1.14 89.25,66.765 89.371,66.886 89.371,67.01 90.034,67.672 90.22,67.672 90.985,68.437 90.985,68.589 91.42,69.025 v1(91.42,69.082) ; U1.31 102.187,83.5 102.367,83.32 102.367,83.032 102.754,82.645 v1(102.754,82.564)
  Bottom Layer w0.254: v1(91.42,69.082) 97.011,74.672 97.145,74.672 102.754,80.281 v1(102.754,82.564)
MOTOR_EN: R9.1 U1.12 | length 14.9
  Top Layer w0.152: R9.1 83.5,73.65 83.5,74.234 83.784,74.518 84.268,74.518 86.195,76.445 86.195,83.143 86.293,83.242 86.293,83.34 86.331,83.378 86.331,85.961 86.421,86.05 U1.12@87.25,86.05
NetC1_2: C1.2 C2.2 R1.2 U1.3 | length 12.4
  Top Layer w0.254: R1.2 78.045,95.901 78.647,95.901 78.656,95.893 79.42,95.893 79.686,96.16 79.686,96.582 79.835,96.731 84.669,96.731 84.818,96.582 84.818,95.904 C2.2 84.84,95.927 85.323,95.927 85.335,95.915 85.397,95.915 85.577,95.735 85.577,94.573 86.327,93.823 86.342,93.823 86.466,93.7 U1.3
NetC3_2: C3.2 R3.2 R4.1 U2.6 U2.7 | length 6.8
  Top Layer w0.152: R3.2 84.173,70.7 84.25,70.7 84.3,70.75 C3.2@86.149,70.75 ; U2.7 U2.6 89.7,71.886 89.676,71.862 89.302,71.862 89.178,71.986 88.118,71.986 R4.1 87.25,72 86.539,71.289 86.539,71.114 C3.2@86.213,70.789 ; C3.2@86.213,70.789 C3.2 C3.2@86.213,70.789
NetC4_1: C4.1 D3.2 L2.1 Q1.3 | length 11.6
  Top Layer w0.5: L2.1 103.185,61 103.685,61.5 107.377,61.5 ; L2.1@103.185,61.075 L2.1@103.685,61.575 ; C4.1 107.377,62.69 107.377,61.5 ; D3.2 107.355,65.04 C4.1@107.355,62.92 ; Q1.3 107.627,59.896 107.627,60.825 107.377,61.075 107.377,61.5
NetC4_2: C4.2 D1.1 D2.2 | length 6.3
  Top Layer w0.5: D1.1 D2.2 103.825,63.675 104.918,62.582 105.417,62.582 C4.2
NetC6_2: C6.2 L2.2 R5.2 | length 13.1
  Top Layer w0.5: R5.2 98.217,68.389 98.217,62.513 99.585,61.146 99.585,58.646 100.085,58.146 100.304,58.146 100.675,57.775 C6.2
NetC7_2: C7.2 J1.5 | length 4.2
  Top Layer w0.152: J1.5 84.75,67.731 85.307,68.288 85.307,69.254 85.539,69.486 C7.2
NetC9_1: C9.1 J1.18 | length 9.1
  Top Layer w0.152: J1.18 91.25,66.765 91.422,66.937 91.422,66.989 91.656,67.223 91.835,67.223 92.742,68.13 92.742,69.863 93.87,70.991 96.144,70.991 96.361,71.208 96.361,71.691 C9.1
NetC10_1: C10.1 J1.20 | length 9.5
  Top Layer w0.152: J1.20 92.25,67.278 92.996,68.024 92.996,69.134 94.494,70.633 97.383,70.633 97.869,71.119 C10.1
NetC11_1: C11.1 J1.22 | length 9.9
  Top Layer w0.152: J1.22 93.25,68.545 93.881,69.176 93.881,69.66 94.511,70.29 97.774,70.29 C11.1
NetC12_1: C12.1 J1.24 | length 10
  Top Layer w0.152: J1.24 94.628,66.265 94.75,66.387 94.75,67.224 v1(95.161,67.635) ; v1(100.751,70.578) 100.751,71.73 C12.1
  Bottom Layer w0.152: v1(95.161,67.635) 97.808,67.635 v1(100.751,70.578)
NetC15_2: C15.2 C16.2 | length 1.3
  Top Layer w0.254: C16.2 C15.2
NetC22_2: C22.2 R20.1 U5.1 | length 4.9
  Top Layer w0.152: 79.029,85.444 79.126,85.347 80.079,85.347 U5.1
  Top Layer w0.254: R20.1 77.415,85.831 77.867,85.831 78.046,85.653 78.075,85.653 78.284,85.444 79.029,85.444 ; C22.2 77.219,86.434 77.365,86.288 77.508,86.288 R20.1@77.395,86.174
NetD4_2: D4.2 M1.2 Q2.3 | length 13.2
  Top Layer w0.5: M1.2 73.978,67.097 73.978,68.728 74.873,69.623 75.629,69.623 75.754,69.748 D4.2 75.754,69.511 76.424,68.841 76.424,68.75 81,68.75 81.75,69.5 81.75,71.473 81.698,71.525 Q2.3
NetD5_1: D5.1 R18.1 | length 1.1
  Top Layer w0.254: R18.1 76.153,82.471 76.26,82.471 76.274,82.486 77.236,82.486 D5.1
NetD6_1: D6.1 R19.1 | length 1.1
  Top Layer w0.254: R19.1 76.3,83.55 D6.1
NetD7_1: D7.1 R26.1 | length 1
  Top Layer w0.254: D7.1 R26.1
NetD8_1: D8.1 R25.1 | length 1
  Top Layer w0.254: D8.1 R25.1
NetJ1_15: J1.15 J1.16 R8.2 | length 9.1
  Top Layer w0.152: J1.15 J1.16 90.262,66.277 90.262,67.144 91.972,68.853 91.972,68.972 92,69 92,70.569 92.775,71.344 94.227,71.344 94.928,72.044 R8.2
NetQ2_1: Q2.1 R9.2 | length 5.7
  Top Layer w0.254: Q2.1 79.349,72.551 79.453,72.654 79.453,73.601 79.601,73.75 80.745,73.75 81.865,72.629 83.308,72.629 R9.2
NetQ3_1: Q3.1 R15.2 | length 5.6
  Top Layer w0.254: R15.2 106.622,88.122 106.622,88.483 108.074,89.935 108.074,91.858 107.925,92.007 107.379,92.007 107.2,91.828 Q3.1
NetQ4_1: Q4.1 R17.2 | length 9.7
  Top Layer w0.3: R17.2 106.813,93.687 108.291,93.687 108.467,93.511 108.467,89.367 107.656,88.557 107.656,86.906 107.606,86.856 107.606,86.157 Q4.1
NetQ5_1: Q5.1 Q6.3 R27.1 | length 6.9
  Top Layer w0.254: Q6.3@77.253,78.047 Q6.3 77.254,77.523 79.304,77.523 79.453,77.375 79.453,75.922 79.601,75.773 80.349,75.773 Q5.1 80.354,75.543 81.077,74.82 81.077,74.584 R27.1
NetQ5_3: Q5.3 R28.2 | length 2.1
  Top Layer w0.254: Q5.3 81.304,78.193 81.477,78.366 81.589,78.366 81.626,78.403 R28.2@83.116,78.403
NetQ6_1: Q6.1 R30.1 | length 5.6
  Top Layer w0.254: R30.1 75.101,79.023 74.953,78.875 74.953,75.773 75.203,75.523 Q6.1
NetR2_1: R2.1 U2.4 | length 5.4
  Top Layer w0.152: R2.1 86.5,73.455 86.5,74.281 86.589,74.37 89.18,74.37 89.7,73.85 U2.4
NetR12_1: R12.1 R14.1 U3.8 | length 4.8
  Top Layer w0.254: R14.1 79.101,87.839 R14.1@79.101,87.837 ; R12.1 79.189,86.756 79.189,87.749 R14.1@79.101,87.837 ; U3.8 81.244,88.967 81.169,88.892 79.829,88.892 79.357,88.419 79.357,88.095 79.099,87.837 R14.1@79.101,87.837
NetR13_1: R13.1 U3.9 | length 9.7
  Top Layer w0.254: v1(78.659,89.014) 78.683,89.038 78.683,89.856 R13.1 ; U3.9 81.744,88.964 81.873,88.836 83.505,88.836 83.914,88.427 v1(83.994,88.427)
  Bottom Layer w0.254: v1(78.659,89.014) 78.674,89.029 83.216,89.029 83.352,88.892 83.529,88.892 v1(83.994,88.427)
NetR21_2: R21.2 U5.8 | length 2.4
  Top Layer w0.152: U5.8 82.975,84.523 82.999,84.547 83.486,84.547 83.958,85.019 83.958,85.044 R21.2
NetR22_2: R22.2 U5.4 | length 3
  Top Layer w0.152: U5.4 79.436,84.123 79.25,83.937 79.25,82.863 79.339,82.773 80.095,82.773 R22.2
NetR23_2: R23.2 U5.7 | length 1.1
  Top Layer w0.152: U5.7@82.313,84.134 83.044,84.134 83.065,84.112 83.245,84.112 R23.2
NetR24_2: R24.2 U5.6 | length 0.8
  Top Layer w0.152: U5.6 U5.6 82.328,83.7 R24.2
NEXT_BTN: C13.1 S1.3 U1.5 | length 29.8
  Top Layer w0.152: C13.1 73.547,81 83.255,81 84.785,82.53 84.785,83.833 84.922,83.97 84.922,85.835 84.826,85.931 84.826,86.164 84.846,86.184 84.846,87.797 84.805,87.839 84.805,89.55 84.885,89.63 84.885,90.147 86.711,91.972 87.223,91.972 U1.5
  Top Layer w0.254: S1.3 68.503,79.473 68.703,79.273 71.453,79.273 71.859,79.68 72.227,79.68 73.031,80.484 C13.1
PREVGH: C5.2 D3.1 J1.21 | length 21.4
  Top Layer w0.254: J1.21 92.75,64.07 93.25,63.57 93.25,63.5 95.932,60.818 96.579,60.818 97.192,60.818 97.226,60.785 97.361,60.785 C5.2
  Top Layer w0.3: v4(96.514,60.218) 96.571,60.276 96.571,60.488 96.579,60.495 96.579,60.818 ; v4(103.137,66.321) 103.697,65.761 103.697,65.134 103.932,65.134 D3.1
  Bottom Layer w0.3: v4(96.514,60.218) 98.169,61.874 98.169,62.169 99.767,63.767 102.367,63.767 103.137,64.537 v4(103.137,66.321)
PREVGL: D1.2 J1.23 | length 11.8
  Top Layer w0.254: J1.23 93.75,68.49 94.186,68.926 94.186,69.534 94.474,69.822 99.425,69.822 99.675,69.572 D1.2
RES_EPD: J1.10 U1.36 | length 28.3
  Top Layer w0.254: J1.10 87.25,67.612 87.44,67.801 v1(87.44,67.881) ; v1(99.772,87.786) 99.79,87.768 101.232,87.768 U1.36
  Bottom Layer w0.254: v1(87.44,67.881) 92.327,72.769 92.478,72.769 95.74,76.03 95.74,83.759 99.767,87.786 v1(99.772,87.786)
RESE: J1.3 Q1.2 R6.2 | length 32.8
  Top Layer w0.254: v4(82.25,67.5) 83.138,67.5 83.628,67.01 83.628,66.886 83.75,66.765 J1.3 ; v4(105.425,56.575) R6.2 105.425,59.221 Q1.2
  Bottom Layer w0.254: v4(82.25,67.5) 90.75,59 101.418,59 103.843,56.575 v4(105.425,56.575)
RTS: Q3.2 R17.1 U3.19 | length 27.1
  Top Layer w0.3: U3.19 83.244,94.262 83.748,94.765 v1(83.748,94.784) ; v1(105,94.5) 105.048,94.452 105.048,94.052 105.35,93.75 105.6,93.75 R17.1@105.625,93.75 ; Q3.2 105.3,92.251 105.3,93.55 105.35,93.6 105.6,93.6 105.625,93.625 R17.1@105.625,93.75 ; R17.1 R17.1@105.625,93.75
  Bottom Layer w0.3: v1(83.748,94.784) 85.021,93.511 104.011,93.511 v1(105,94.5)
RX: U1.39 U3.20 | length 24.8
  Top Layer w0.254: v1(82.707,94.87) 82.741,94.835 82.741,93.619 U3.20 ; U1.39 102.085,90.3 102.158,90.373 102.18,90.373 102.443,90.637 102.443,90.725 102.548,90.83 v1(102.548,91.508)
  Bottom Layer w0.254: v1(82.707,94.87) 82.73,94.87 86.1,91.5 102.54,91.5 v1(102.548,91.508)
SCK_ACCL: U1.16 U2.10 | length 14
  Top Layer w0.152: U1.16 88.304,82.446 88.304,81.188 v1(88.308,81.183) ; U2.10 90.874,72.474 91.086,72.474 91.569,72.957 91.569,73.437 91.456,73.55 v1(91.456,74.075)
  Bottom Layer w0.152: v1(88.308,81.183) 89.086,81.183 89.733,80.537 91.213,80.537 92.331,79.419 92.331,74.579 92.072,74.32 91.808,74.32 91.563,74.075 v1(91.456,74.075)
SCLK_EPD: J1.13 U1.32 | length 24.4
  Top Layer w0.254: J1.13 88.773,66.288 88.773,67.041 90.383,68.651 v1(90.383,68.686) ; v1(99.783,84.404) 99.81,84.377 101.223,84.377 U1.32
  Bottom Layer w0.254: v1(90.383,68.686) 90.383,68.766 90.832,69.215 90.832,69.344 92.894,71.407 93.087,71.407 98.5,76.819 98.5,83.25 99.049,83.799 99.177,83.799 v1(99.783,84.404)
SELECT_BTN: C14.1 S2.3 U1.6 | length 34
  Top Layer w0.152: C14.1 74.075,77.12 74.164,77.21 74.164,80.534 74.253,80.623 83.376,80.623 85.137,82.384 85.137,83.687 85.274,83.824 85.274,85.981 85.216,86.04 85.216,87.926 85.157,87.985 85.157,89.404 86.78,91.026 87.127,91.026 U1.6
  Top Layer w0.254: S2.3 68.5,72.589 68.5,73.717 68.649,73.866 71.116,73.866 71.785,74.535 71.785,75.809 C14.1
STAT1: D5.2 U5.9 | length 8.1
  Top Layer w0.152: D5.2 78.429,82.321 79.002,82.321 v1(79.37,81.953) ; U5.9 83.018,84.923 83.342,85.247 v1(83.407,85.247)
  Bottom Layer w0.152: v1(79.37,81.953) 80.237,81.953 81.71,83.426 81.71,83.691 82.449,84.43 82.59,84.43 v1(83.407,85.247)
STAT2: D6.2 U5.3 | length 2.2
  Top Layer w0.152: D6.2 78.751,84.001 78.815,84.001 79.338,84.523 U5.3
SYS: C20.2 R20.2 U4.1 U4.3 | length 12.3
  Top Layer w0.254: U4.3 67.772,85.655 67.772,85.997 67.804,86.028 67.804,86.163 68.164,86.523 71.688,86.523 71.552,86.388 71.552,84.828 71.525,84.801 71.525,84.628 C20.2 ; U4.1 69.487,85.713 69.778,86.003 69.778,86.375 ; 71.686,86.522 73.115,86.522 73.146,86.491 75.013,86.491 75.071,86.434 75.162,86.434 75.485,86.111 R20.2
TX: U1.40 U3.21 | length 22.8
  Top Layer w0.254: v1(81.701,94.819) 81.781,94.819 82.001,94.598 82.065,94.598 82.244,94.418 U3.21@82.244,93.636 ; v1(100,90.898) 100.08,90.898 100.332,91.15 U1.40
  Bottom Layer w0.254: v1(81.701,94.819) 83.157,93.362 83.735,93.362 86.199,90.898 v1(100,90.898)
V_BAT_ADC: R28.1 R29.2 U1.8 | length 15.3
  Top Layer w0.152: R29.2 83.373,79.49 83.446,79.564 ; R28.1 84.123,78.887 83.446,79.564 ; U1.8@87.25,89.45 86.7,89.45 85.941,88.691 85.941,86.311 85.979,86.273 85.979,83.524 85.941,83.486 85.941,83.388 85.842,83.289 85.842,81.96 83.446,79.564
VBAT: C25.2 J3.2 Q5.2 R27.2 U5.2 | length 31.6
  Top Layer w0.152: 79.022,84.952 79.051,84.923 U5.2
  Top Layer w0.254: 78.597,84.527 79.022,84.952
  Top Layer w0.5: C25.2 74.098,84.13 74.328,84.13 74.335,84.123 74.896,84.685 76.722,84.685 76.88,84.527 78.597,84.527 ; R27.2 82.291,74.47 82.72,74.47 83.5,75.25 83.5,75.5 83.641,75.641 ; Q5.2 83.514,75.768 83.641,75.641 ; v3(83.788,76.759) 83.641,76.612 83.641,75.641
  Bottom Layer w0.5: v3(74.95,84.685) 78.575,81.06 78.575,80.346 82.161,76.759 v3(83.788,76.759) 83.852,76.695 91.296,76.695 J3.2
VBUS: C23.2 C24.2 J2.A4 J2.A9 J2.B4 J2.B9 R12.2 U5.10 | length 32.4
  Top Layer w0.152: 82.269,85.706 82.269,85.647 82.321,85.595 82.321,85.347 82.303,85.329 U5.10
  Top Layer w0.254: J2.A4 J2.B9 73.642,94.353 74.9,94.353 v1(74.948,94.401) ; 75.535,88.475 78.301,88.475 78.45,88.326 78.45,87.694 78.462,87.682 78.462,87.34 78.301,87.178 78.301,86.904 78.166,86.769 78.166,86.387 78.611,85.942 80.192,85.942 80.411,86.161 ; R12.2 80.367,86.578 80.367,86.205 80.411,86.161 ; 82.269,85.706 82.269,85.752 82.321,85.805 82.321,86.158 C23.2 ; v1(83.997,86.424) 82.638,86.424 C23.2 ; 80.411,86.161 81.038,86.161 C24.2 81.321,86.444 82.607,86.444 C23.2
  Top Layer w0.3: J2.A9 74.47,89.53 74.75,89.25 74.759,89.25 75.535,88.475
  Bottom Layer w0.3: v1(74.948,94.401) 77.809,94.401 79.587,92.623 79.587,92.589 82.56,89.616 84.177,89.616 84.75,89.043 84.75,86.908 84.316,86.474 84.115,86.474 84.065,86.424 v1(83.997,86.424)
pads on no net: J1.1 J1.4 J1.6 J1.7 J1.19 J1.MP1 J1.MP2 J2.1 J2.2 J2.3 J2.4 J2.A8 J2.B8 S1.2 S1.4 S1.MH1 S1.MH2 S2.2 S2.4 S2.MH1 S2.MH2 S3.2 S3.4 S3.MH1 S3.MH2 S4.2 S4.4 S4.MH1 S4.MH2 U1.9 U1.10 U1.11 U1.13 U1.14 U1.20 U1.21 U1.22 U1.24 U1.25 U1.26 U1.27 U1.28 U1.29 U1.30 U1.33 U1.38 U1.41 U1.44 U2.3 U3.1 U3.7 U3.10 U3.11 U3.12 U3.13 U3.14 U3.15 U3.16 U3.17 U3.18 U3.22 U3.24 U4.4

## Polygon pours and split planes (outlines as drawn)
GND on Top Layer "NONET_L01_P001" (solid, remove dead copper, shelved, pour order 1): 53.5,108.25 54,108.75 133.5,108.75 133.5,32.75 133.75,32.5 53.25,32.5
GND on GND Layer "NONET_L02_P003" (solid, shelved, pour order 3): 54.442,107.39 54.552,107.5 123.5,107.5 123.5,46.25 123.75,46 123.25,45.5 58,45.5 54.712,48.788 54.712,107.406
3.3 on 3v3 Layer "NONET_L03_P004" (solid, shelved, pour order 4): 54.75,110.5 123,110.5 123.5,111 123.75,110.75 123.75,42.5 52.75,42.5 52.5,42.75 54.75,45
GND on Bottom Layer "NONET_L04_P002" (solid, shelved, pour order 2): 58.5,108.75 127.25,108.75 127.25,37.25 125.75,35.75 50,35.75 50,100.5 58.5,109